# Altium PCB Hall Effect Sensor Panel PCB.PcbDoc
Units mm, origin at the board's own origin, x right, y up, seen from the top; angles counter-clockwise.
Board outline 358 x 45 mm, 2 copper layers (Top Layer, Bottom Layer); 56 components, 26 nets, 179 pads, 9 vias.
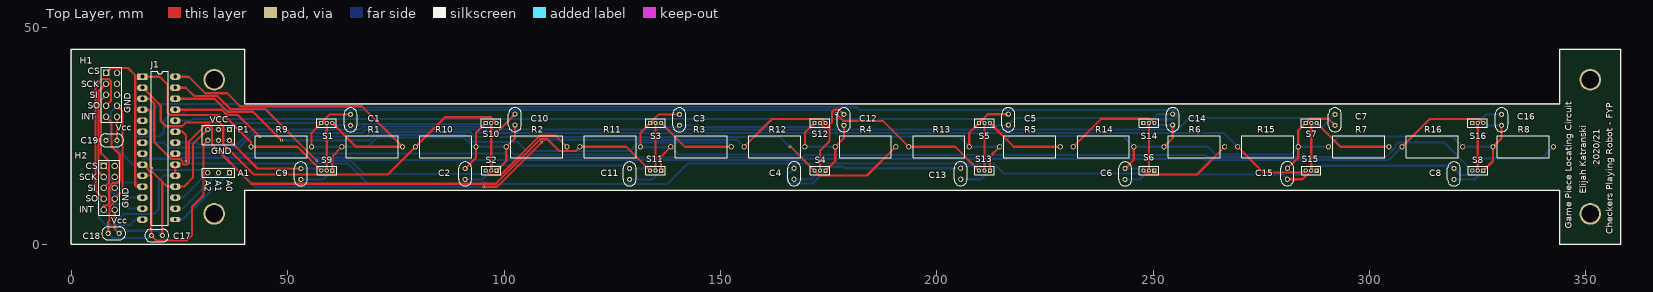
[diagram p0: Top Layer view]
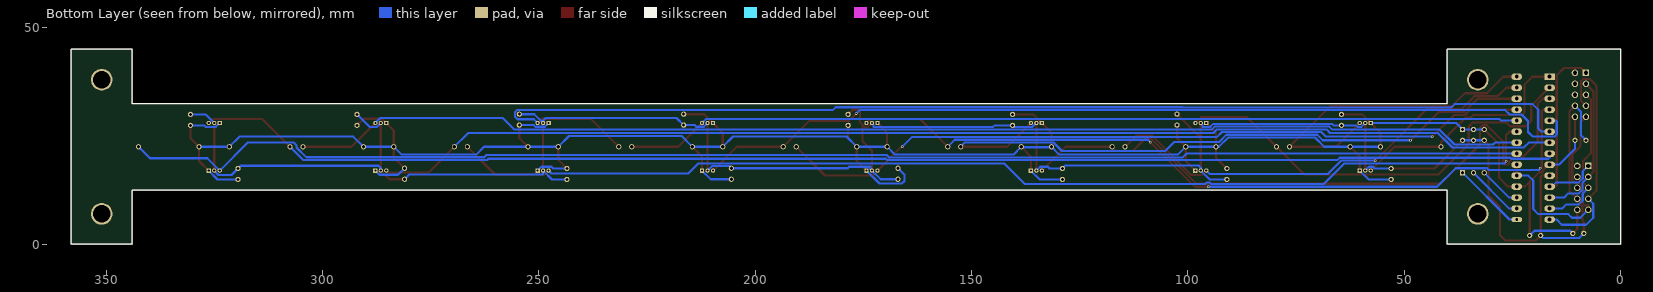
[diagram p1: Bottom Layer view, seen from below]

## Layer stack, top to bottom
Top Solder: solder mask 0.0102, Solder Resist, Dk 3.5
Top Layer: signal copper 0.0356
Dielectric 1: dielectric 0.32, FR-4, Dk 4.8
Bottom Layer: signal copper 0.0356
Bottom Solder: solder mask 0.0102, Solder Resist, Dk 3.5

## Board outline
344,32.5 344,45 358,45 358,0 344,0 344,12.5 40,12.5 40,0 0,0 0,45 40,45 40,32.5

## Design rules (kind name [scope] priority, off if disabled: settings)
Clearance [All] p1: gap=0.13 ignorepadtopadclearanceinfootprint=FALSE
PolygonConnect [All] p1: connectstyle=Relief reliefconductorwidth=0.254 reliefentries=4 polygonreliefangle="90 Angle" airgapwidth=0.254
RoutingVias [All] p1: holewidth=0.3 width=0.6 viastyle="Through Hole" minholewidth=0.3 minwidth=0.6 maxholewidth=0.3 maxwidth=0.6
SolderMaskExpansion [All] p1: expansion=0.102 istentingtop=FALSE
Width [All] p1: maxlimit=1 minlimit=0.3 preferedwidth=0.5
30 further rules are at their usual default settings.

## Components (designator, comment, footprint, x,y, rotation, side; value= is the part's Value field where it differs from the comment)
A1 "Address" ADDRESS 36.5,16.5 r270 top
C1 "0.1uF" C320C104K5R5TA 64.5,27.46 r90 top
C2 "0.1uF" C320C104K5R5TA 91,14.96 r90 top
C3 "0.1uF" C320C104K5R5TA 140.5,27.46 r90 top
C4 "0.1uF" C320C104K5R5TA 167,15 r90 top
C5 "0.1uF" C320C104K5R5TA 216.5,27.5 r90 top
C6 "0.1uF" C320C104K5R5TA 243.5,14.96 r90 top
C7 "0.1uF" C320C104K5R5TA 292,30 r270 top
C8 "0.1uF" C320C104K5R5TA 319.5,17.5 r270 top
C9 "0.1uF" C320C104K5R5TA 53,14.96 r90 top
C10 "0.1uF" C320C104K5R5TA 102.5,27.5 r90 top
C11 "0.1uF" C320C104K5R5TA 129,14.96 r90 top
C12 "0.1uF" C320C104K5R5TA 178.5,27.46 r90 top
C13 "0.1uF" C320C104K5R5TA 205.5,15 r90 top
C14 "0.1uF" C320C104K5R5TA 254.5,27.5 r90 top
C15 "0.1uF" C320C104K5R5TA 281,17.54 r270 top
C16 "0.1uF" C320C104K5R5TA 330.5,27.46 r90 top
C17 "0.1uF" C320C104K5R5TA 18.46,2 r0 top
C18 "0.1uF" C320C104K5R5TA 8.5,2.5 r0 top
C19 "0.1uF" C320C104K5R5TA 8,24 r0 top
H1 "1x7 Header" "PCB Header" 8,39.58 r0 top
H2 "1x7 Header" "PCB Header" 7.46,18.08 r0 top
J1 "16-Bit I/O Expander" MCP23S17-E/SP 16.38,38.7 r0 top
P1 "Power" POWER 36.5,26.5 r270 top
R1 "4k7R" CFR100J4K7 76.5,22.5 r180 top
R2 "4k7R" CFR100J4K7 114.5,22.5 r180 top
R3 "4k7R" CFR100J4K7 152.5,22.5 r180 top
R4 "4k7R" CFR100J4K7 190.5,22.5 r180 top
R5 "4k7R" CFR100J4K7 228.5,22.5 r180 top
R6 "4k7R" CFR100J4K7 266.5,22.5 r180 top
R7 "4k7R" CFR100J4K7 304.5,22.5 r180 top
R8 "4k7R" CFR100J4K7 342.5,22.5 r180 top
R9 "4k7R" CFR100J4K7 55.5,22.5 r180 top
R10 "4k7R" CFR100J4K7 93.5,22.5 r180 top
R11 "4k7R" CFR100J4K7 131.5,22.5 r180 top
R12 "4k7R" CFR100J4K7 169.5,22.5 r180 top
R13 "4k7R" CFR100J4K7 207.5,22.5 r180 top
R14 "4k7R" CFR100J4K7 245.5,22.5 r180 top
R15 "4k7R" CFR100J4K7 283.5,22.5 r180 top
R16 "4k7R" CFR100J4K7 321.5,22.5 r180 top
S1 "Hall Effect Sensor" A1104EUA-T 57.73,28 r90 top
S2 "Hall Effect Sensor" A1104EUA-T 98.27,17 r270 top
S3 "Hall Effect Sensor" A1104EUA-T 133.73,28 r90 top
S4 "Hall Effect Sensor" A1104EUA-T 174.27,17 r270 top
S5 "Hall Effect Sensor" A1104EUA-T 209.73,28 r90 top
S6 "Hall Effect Sensor" A1104EUA-T 250.27,17 r270 top
S7 "Hall Effect Sensor" A1104EUA-T 285.23,28 r90 top
S8 "Hall Effect Sensor" A1104EUA-T 326.27,17 r270 top
S9 "Hall Effect Sensor" A1104EUA-T 60.27,17 r270 top
S10 "Hall Effect Sensor" A1104EUA-T 95.73,28 r90 top
S11 "Hall Effect Sensor" A1104EUA-T 136.27,17 r270 top
S12 "Hall Effect Sensor" A1104EUA-T 171.73,28 r90 top
S13 "Hall Effect Sensor" A1104EUA-T 212.27,17 r270 top
S14 "Hall Effect Sensor" A1104EUA-T 247.73,28 r90 top
S15 "Hall Effect Sensor" A1104EUA-T 287.77,17 r270 top
S16 "Hall Effect Sensor" A1104EUA-T 323.73,28 r90 top

## Footprints (in the part's own frame and the unit in brackets; to place one, negate y for a bottom-side part, rotate by r counter-clockwise, add the part's x,y. Pads: shape width x height; smd on the part's side, far side on the other; paste and mask are expansions set on the pad)
A1104EUA-T [mm]
  rect 1x1 hole 0.5: 1(0,0)
  round 1 hole 0.5: 2(0,-1.27) 3(0,-2.54)
  silkscreen extent -1,-3.5 1,1
ADDRESS [mm]
  rect 1.2x1.2 hole 0.7: 1(0,0)
  round 1.2 hole 0.7: 2(0,-2.5) 3(0,-5)
  silkscreen extent -1,-6.25 1,1.25
C320C104K5R5TA [mm]
  round 1.2 hole 0.7: 1(0,0) 2(2.54,0)
  silkscreen extent -1.5,-1.5 4.04,1.5
CFR100J4K7 [mm]
  round 1.2 hole 0.76: 1(0,0) 2(14,0)
  silkscreen extent 1,-2.5 13,2.5
MCP23S17-E/SP [mm]
  rect 2.5x1.5 hole 0.9: 1(0,0)
  oval 2.5x1.5 hole 0.9: 2(0,-2.54) 3(0,-5.08) 4(0,-7.62) 5(0,-10.16) 6(0,-12.7) 7(0,-15.24) 8(0,-17.78) 9(0,-20.32) 10(0,-22.86) 11(0,-25.4) 12(0,-27.94) 13(0,-30.48) 14(0,-33.02) 16(7.62,-30.48) 17(7.62,-27.94) 18(7.62,-25.4) 19(7.62,-22.86) 20(7.62,-20.32) 21(7.62,-17.78) 22(7.62,-15.24) 23(7.62,-12.7) 24(7.62,-10.16) 25(7.62,-7.62) 26(7.62,-5.08) 27(7.62,-2.54) 28(7.62,0)
  oval 2.5x1.2 hole 0.65: 15(7.62,-33.02)
  silkscreen extent 2.08,-34.29 6,1.27
"PCB Header" [mm]
  rect 1.5x1.5 / inner rect 1.5x1.6 / far side rect 1.5x1.5 hole 1: 1(0,0)
  round 1.5 / inner oval 1.5x1.6 / far side round 1.5 hole 1: 2(0,-2.54) 3(0,-5.08) 4(0,-7.62) 5(0,-10.16) 6(2.54,-10.16) 7(2.54,-7.62) 8(2.54,-5.08) 9(2.54,-2.54) 10(2.54,0)
  silkscreen extent -1.15,-11.43 3.68,1.27
POWER [mm]
  rect 1.2x1.2 hole 0.7: 1(0,0)
  round 1.2 hole 0.7: 2(0,-2.5) 3(0,-5) 4(2.5,-5) 5(2.5,-2.5) 6(2.5,0)
  silkscreen extent -1,-6.25 3.5,1.25

## Part data
C1 C2 C3 C4 C5 C6 C7 C8 C9 C10 C11 C12 C13 C14 C15 C16 C17 C18 C19: library part C320C104K5R5TA, "KEMET - C320C104K5R5TA - Multilayer Ceramic Capacitor, Gold Max, 0.1 µF, 50 V, Goldmax, 300 Series, ± 10%, Radial Leaded", Capacitance=100nF, Case/Package=Radial, Dielectric=X7R, Dielectric Material=Ceramic, Manufacturer=KEMET, Max Operating Temperature=125°C, Min Operating Temperature=-55°C, Package Quantity=500, Supplier Part Number 1=1466304, Tolerance=10%, Voltage=50V, Category="Ceramic Capacitors", ComponentLink1Description=https://datasheet.ciiva.com/27052/1570161-27052544.pdf?src-supplier=Jameco, ComponentLink1URL=https://datasheet.ciiva.com/27052/1570161-27052544.pdf?src-supplier=Jameco, ComponentLink2Description=https://datasheet.ciiva.com/39122/f3101-goldmax-39122993.pdf?src-supplier=Onlinecomponents.com, ComponentLink2URL=https://datasheet.ciiva.com/39122/f3101-goldmax-39122993.pdf?src-supplier=Onlinecomponents.com, ComponentLink3Description=https://datasheet.ciiva.com/11786/0900766b80717e24-11786584.pdf?src-supplier=RSComponents, ComponentLink3URL=https://datasheet.ciiva.com/11786/0900766b80717e24-11786584.pdf?src-supplier=RSComponents, ComponentLink4Description=https://datasheet.ciiva.com/7817/1732702-7817354.pdf?src-supplier=Element14, ComponentLink4URL=https://datasheet.ciiva.com/7817/1732702-7817354.pdf?src-supplier=Element14, ComponentLink5Description=https://datasheet.ciiva.com/16624/datasheetpn-c320c104k5r5ca-16624750.pdf?src-supplier=Avnet+Europe, ComponentLink5URL=https://datasheet.ciiva.com/16624/datasheetpn-c320c104k5r5ca-16624750.pdf?src-supplier=Avnet+Europe, ComponentLink6Description=https://datasheet.ciiva.com/7817/f3101-goldmax-7817514.pdf?src-supplier=Element14, ComponentLink6URL=https://datasheet.ciiva.com/7817/f3101-goldmax-7817514.pdf?src-supplier=Element14, ComponentLink7Description=https://datasheet.ciiva.com/14585/70095037-14585005.pdf?src-supplier=Allied+Electronics, ComponentLink7URL=https://datasheet.ciiva.com/14585/70095037-14585005.pdf?src-supplier=Allied+Electronics, ComponentLink8Description=https://datasheet.ciiva.com/5389/f3101-goldmax-334604-5389886.pdf?src-supplier=Mouser, ComponentLink8URL=https://datasheet.ciiva.com/5389/f3101-goldmax-334604-5389886.pdf?src-supplier=Mouser, Depth=3.18mm, Dissipation Factor=2.5%, Height=3.18mm, Height - Seated (Max)=0.26inch, Lead Diameter=0.51mm, Lead Free="Lead Free", Lead Length=7mm, Lead Pitch=2.54mm, Lead/Base Style=Straight, Length=5.08mm, Manufacturer Part Number=C320C104K5R5TA, Mount="Through Hole,PCB", Number of Pins=2, Packaging=Bulk, Radiation Hardening=No, REACH SVHC="No SVHC", Resistor Type=Ceramic, RoHS=Yes, RoHS Compliant=Yes, Supplier 1=RSComponents, Termination=Radial, Voltage Rating=50V, Voltage Rating (DC)=50V, Width=0.125inch
H1 H2: library part 22-23-2071, "CONN HEADER VERT 7POS 2.54MM", Color=White, Contact Resistance=10mR, Current Rating=4A, Flammability Rating="UL94 V-0", Insulation Resistance=500GR, Manufacturer=Molex, Max Current Rating=10A, Max Operating Temperature=75°C, Max Voltage Rating (AC)=250V, Min Operating Temperature=0°C, Package Quantity=4000, Supplier Part Number 1=6795603P, Approvals=UL,CSA, Category="Headers and Wire Housings", ComponentLink1Description=https://datasheet.ciiva.com/30052/39000022232071-pcb-headers-30052246.pdf?src-supplier=Onlinecomponents.com, ComponentLink1URL=https://datasheet.ciiva.com/30052/39000022232071-pcb-headers-30052246.pdf?src-supplier=Onlinecomponents.com, ComponentLink2Description=https://datasheet.ciiva.com/7839/1575011-7839927.pdf?src-supplier=Element14, ComponentLink2URL=https://datasheet.ciiva.com/7839/1575011-7839927.pdf?src-supplier=Element14, ComponentLink3Description=https://datasheet.ciiva.com/5154/0022232071-pcb-headers-227102-5154393.pdf?src-supplier=Mouser, ComponentLink3URL=https://datasheet.ciiva.com/5154/0022232071-pcb-headers-227102-5154393.pdf?src-supplier=Mouser, ComponentLink4Description=https://datasheet.ciiva.com/11749/0900766b80d8f4d1-11749289.pdf?src-supplier=RSComponents, ComponentLink4URL=https://datasheet.ciiva.com/11749/0900766b80d8f4d1-11749289.pdf?src-supplier=RSComponents, ComponentLink5Description=https://datasheet.ciiva.com/19462/1966270-19462253.pdf?src-supplier=Jameco, ComponentLink5URL=https://datasheet.ciiva.com/19462/1966270-19462253.pdf?src-supplier=Jameco, ComponentLink6Description=https://datasheet.ciiva.com/49273/232311-49273642.pdf?src-supplier=Jameco, ComponentLink6URL=https://datasheet.ciiva.com/49273/232311-49273642.pdf?src-supplier=Jameco, ComponentLink7Description=https://datasheet.ciiva.com/16725/0022232071-pcb-headers-16725645.pdf?src-supplier=Avnet+Europe, ComponentLink7URL=https://datasheet.ciiva.com/16725/0022232071-pcb-headers-16725645.pdf?src-supplier=Avnet+Europe, ComponentLink8Description=https://datasheet.ciiva.com/10087/0022232071-pcb-headers-10087214.pdf?src-supplier=Avnet, ComponentLink8URL=https://datasheet.ciiva.com/10087/0022232071-pcb-headers-10087214.pdf?src-supplier=Avnet, Contact Gender=Male, Contact Material=Brass, Contact Plating=Tin,Copper, Depth=3.56mm, Gender=Male, Glow Wire Compliant=Non-compliant, Halogen Free="Low Halogen", Height=4.5mm, Housing Color=White, Housing Material=Nylon, Lead Free="Lead Free", Manufacturer Part Number=22-23-2071, Mount="Through Hole,Cable", Number of Circuits=7, Number of Contacts=7, Number of Positions=7, Number of Rows=1, Orientation=Straight, Packaging=Bulk, Pitch=2.54mm, Pricing 1="10=0.34600 (USD)", Radiation Hardening=No, REACH SVHC=Unknown, RoHS=Yes, RoHS Compliant=Yes, Series=6373, Stock 1=4279, Supplier 1=RSComponents, Termination="Through Hole", Voltage Rating=250V, Voltage Rating (DC)=250V
J1: library part MCP23S17-E/SP, "TE CONNECTIVITY         CFR100J4K7             Through Hole Resistor, 4.7 kohm, 500 V, Axial Leaded, 1 W,  5%, CFR Series", Case/Package=PDIP, Frequency=10MHz, Manufacturer=Microchip, Max Operating Temperature=125°C, Max Supply Voltage=5.5V, Min Operating Temperature=-40°C, Min Supply Voltage=1.8V, Nominal Supply Current=1mA, Number of Resistors=1, Power Rating=1W, Resistance=4.7kR, Resistor Type="Thin Film", Supplier Part Number 1=9126833, Temperature Coefficient=0ppm/°C, Tolerance=5%, Voltage Rating=500V, Category="Interface ICs", ComponentLink1Description=https://datasheet.ciiva.com/12096/21952b-70868-12096976.pdf?src-supplier=Mouser, ComponentLink1URL=https://datasheet.ciiva.com/12096/21952b-70868-12096976.pdf?src-supplier=Mouser, ComponentLink2Description=https://datasheet.ciiva.com/1780/21952b-1780558.pdf?src-supplier=Digi-Key, ComponentLink2URL=https://datasheet.ciiva.com/1780/21952b-1780558.pdf?src-supplier=Digi-Key, ComponentLink3Description=https://datasheet.ciiva.com/1495/12179-1495925.pdf?src-supplier=Element14, ComponentLink3URL=https://datasheet.ciiva.com/1495/12179-1495925.pdf?src-supplier=Element14, ComponentLink4Description=https://datasheet.ciiva.com/1496/12179-1496067.pdf?src-supplier=Element14, ComponentLink4URL=https://datasheet.ciiva.com/1496/12179-1496067.pdf?src-supplier=Element14, ComponentLink5Description=https://datasheet.ciiva.com/16331/filehandler-aspxddocname-en023709-16331287.pdf?src-supplier=Future+Electronics, ComponentLink5URL=https://datasheet.ciiva.com/16331/filehandler-aspxddocname-en023709-16331287.pdf?src-supplier=Future+Electronics, ComponentLink6Description=https://datasheet.ciiva.com/16617/21952b-16617642.pdf?src-supplier=Avnet+Europe, ComponentLink6URL=https://datasheet.ciiva.com/16617/21952b-16617642.pdf?src-supplier=Avnet+Europe, ComponentLink7Description=https://datasheet.ciiva.com/18405/70046137-18405548.pdf?src-supplier=Allied+Electronics, ComponentLink7URL=https://datasheet.ciiva.com/18405/70046137-18405548.pdf?src-supplier=Allied+Electronics, ComponentLink8Description=https://datasheet.ciiva.com/29305/651444-da-01-en-ic-i-o-exp-mcp23s17-e-sp-spdip-28-mcp-29305148.pdf?src-supplier=Conrad, ComponentLink8URL=https://datasheet.ciiva.com/29305/651444-da-01-en-ic-i-o-exp-mcp23s17-e-sp-spdip-28-mcp-29305148.pdf?src-supplier=Conrad, ComponentLink9Description=https://datasheet.ciiva.com/11823/0900766b80098b49-11823401.pdf?src-supplier=RSComponents, ComponentLink9URL=https://datasheet.ciiva.com/11823/0900766b80098b49-11823401.pdf?src-supplier=RSComponents, ComponentLink10Description=https://datasheet.ciiva.com/22664/1723854-22664921.pdf?src-supplier=Element14, ComponentLink10URL=https://datasheet.ciiva.com/22664/1723854-22664921.pdf?src-supplier=Element14, ComponentLink11Description=https://datasheet.ciiva.com/16773/70063023-16773435.pdf?src-supplier=Allied+Electronics, ComponentLink11URL=https://datasheet.ciiva.com/16773/70063023-16773435.pdf?src-supplier=Allied+Electronics, Diameter=5mm, ELV=Compliant, Interface=SPI,Serial, Lead Free="Lead Free", Length=12mm, Manufacturer Part Number=MCP23S17-E/SP, Max Frequency=10MHz, Mount="Through Hole,Surface Mount", Number of Bits=16, Number of Channels=1, Number of I/Os=16, Number of Pins=28, Number of Terminations=2, Packaging=Rail/Tube, Pricing 1="15=1.29300, 30=1.22600, 105=1.10500 (USD)", Pricing 2="10=0.11800, 100=0.10100, 250=0.08900, 500=0.07500, 1000=0.06400 (USD)", REACH SVHC="No SVHC", RoHS=Yes, RoHS Compliant=Yes, Stock 1=210, Stock 2=2440, Supplier 1=RSComponents, Supply Current=1mA, Supply Voltage-Nom=5.5V, Termination=Axial, Voltage Rating (DC)=500V
R1 R2 R3 R4 R5 R6 R7 R8 R9 R10 R11 R12 R13 R14 R15 R16: library part CFR100J4K7, "TE CONNECTIVITY         CFR100J4K7             Through Hole Resistor, 4.7 kohm, 500 V, Axial Leaded, 1 W,  5%, CFR Series", Case/Package=Conformal, Manufacturer="TE Connectivity", Max Operating Temperature=155°C, Min Operating Temperature=-55°C, Number of Resistors=1, Power Rating=1W, Resistance=4.7kR, Resistor Type="Thin Film", Supplier Part Number 1=0131873, Temperature Coefficient=0ppm/°C, Tolerance=5%, Voltage Rating=500V, Category="Through-Hole Resistors", ComponentLink1Description=https://datasheet.ciiva.com/11823/0900766b80098b49-11823401.pdf?src-supplier=RSComponents, ComponentLink1URL=https://datasheet.ciiva.com/11823/0900766b80098b49-11823401.pdf?src-supplier=RSComponents, ComponentLink2Description=https://datasheet.ciiva.com/22664/1723854-22664921.pdf?src-supplier=Element14, ComponentLink2URL=https://datasheet.ciiva.com/22664/1723854-22664921.pdf?src-supplier=Element14, ComponentLink3Description=https://datasheet.ciiva.com/16773/70063023-16773435.pdf?src-supplier=Allied+Electronics, ComponentLink3URL=https://datasheet.ciiva.com/16773/70063023-16773435.pdf?src-supplier=Allied+Electronics, Diameter=5mm, ELV=Compliant, Length=12mm, Manufacturer Part Number=CFR100J4K7, Mount=Axial, Number of Terminations=2, Packaging="Ammo Pack", Pricing 1="10=0.11800, 100=0.10100, 250=0.08900, 500=0.07500, 1000=0.06400 (USD)", REACH SVHC="No SVHC", RoHS=Yes, Stock 1=2440, Supplier 1=RSComponents, Termination=Axial, Voltage Rating (DC)=500V
S1 S2 S3 S4 S5 S6 S7 S8 S9 S10 S11 S12 S13 S14 S15 S16: library part A1104EUA-T, "ALLEGRO MICROSYSTEMS - A1104EUA-T - IC, HALL-EFFECT SWITCH SIP-3", Case/Package=SIP, Manufacturer="Allegro MicroSystems", Max Operating Temperature=85°C, Max Output Current=25mA, Max Supply Current=7.5mA, Max Supply Voltage=24V, Min Operating Temperature=-40°C, Min Supply Voltage=3.8V, Package Quantity=4000, Supplier Part Number 1=6807488, Category="Magnetic Sensors", ComponentLink1Description=https://datasheet.ciiva.com/15099/getdatasheetpartid-305695-15099469.pdf?src-supplier=Verical, ComponentLink1URL=https://datasheet.ciiva.com/15099/getdatasheetpartid-305695-15099469.pdf?src-supplier=Verical, ComponentLink2Description=https://datasheet.ciiva.com/1173/1697218-1173986.pdf?src-supplier=Newark, ComponentLink2URL=https://datasheet.ciiva.com/1173/1697218-1173986.pdf?src-supplier=Newark, ComponentLink3Description=https://datasheet.ciiva.com/3272/a110x-datasheet-3272173.pdf?src-supplier=Avnet, ComponentLink3URL=https://datasheet.ciiva.com/3272/a110x-datasheet-3272173.pdf?src-supplier=Avnet, Height=3.02mm, Lead Free="Lead Free", Length=4.09mm, Manufacturer Part Number=A1104EUA-T, Mount="Through Hole", Number of Pins=3, Operating Supply Current=7.5mA, Output Current=25mA, Output Type=Digital, Packaging=Bulk, Pricing 1="5=1.09300, 25=0.90800, 100=0.76300, 250=0.71200, 500=0.67100 (USD)", Radiation Hardening=No, REACH SVHC="No SVHC", RoHS=Yes, RoHS Compliant=Yes, Stock 1=245, Supplier 1=RSComponents, Type="Unipolar Switch", Width=1.52mm

## Free pads (board coordinates)
  round 5 hole 4: 1(33,38) 2(33,7) 3(351,38) 4(351,7)

## Via types
v1: diameter 0.6, hole 0.3, Top Layer to Bottom Layer, 9 vias

## Nets (pads, with @x,y where several pads share a name; then routed paths per layer and width w, separated by ;. In a path a pad name is that pad's centre, name@x,y a point inside that pad or via, vN(x,y) a via of type N, cw(c..) or ccw(c..) an arc to the next point about the centre after c; other vN are vias at no path point)
GND: C1.1 C2.1 C3.1 C4.1 C5.1 C6.1 C7.1 C8.1 C9.2 C10.2 C11.2 C12.2 C13.2 C14.2 C15.2 C16.2 C17.1 C18.1 C19.1 H1.7 H2.7 J1.10 P1.4 P1.5 P1.6 S1.2 S2.2 S3.2 S4.2 S5.2 S6.2 S7.2 S8.2 S9.2 S10.2 S11.2 S12.2 S13.2 S14.2 S15.2 S16.2 | length 555.3
  Top Layer w0.5: C18.1 8.5,5.071 8.763,5.334 8.763,8.567 10,9.804 H2.7 11.786,12.246 11.786,30.714 H1.7 ; J1.10 18.339,15.84 18.46,15.719 C17.1 19.622,0.838 26.67,0.838 27.864,2.032 27.864,8.636 30.505,11.278 30.505,23.005 P1.4 ; P1.6 43,17.5 C9.2 ; S9.2 S1.2 ; S2.2 97,24.54 ; S10.2 97,24.54 ; C10.2 97,24.54 ; S11.2 S3.2 ; S4.2 173,21.565 175.158,23.723 175.158,27.558 ; S12.2 174.076,26.924 174.524,26.924 175.158,27.558 ; C12.2 177.436,31.064 176.276,31.064 175.743,30.531 175.743,28.143 175.158,27.558 ; S13.2 S5.2 ; S6.2 S14.2 ; C15.2 284.5,15 S15.2 S7.2 ; S8.2 S16.2
  Bottom Layer w0.5: C19.1 9.144,25.144 9.144,30.564 H1.7 ; C18.1 9.603,1.397 17.857,1.397 C17.1 ; P1.4 P1.5 P1.6 ; C9.2 56.845,17.5 57.227,17.882 58.118,17.882 S9.2 ; S1.2 59.898,27.102 60.757,27.102 61.115,27.46 C1.1 66.364,27.46 66.697,27.793 94.102,27.793 94.794,27.102 96.622,27.102 96.622,27.622 S10.2 ; C2.1 94.96,14.96 S2.2 97,17.65 97.536,18.186 128.314,18.186 C11.2 131.953,17.5 132.335,17.882 134.118,17.882 S11.2 ; S3.2 135.898,27.102 140.142,27.102 C3.1 144.653,27.46 145.011,27.102 172.618,27.102 172.618,27.618 S12.2 ; C4.1 171,15 S4.2 173.38,17.38 173.38,17.882 178.232,17.882 178.573,17.54 C13.2 205.994,18.034 209.966,18.034 S13.2 ; S5.2 211.88,27.12 213.589,27.12 213.969,27.5 C5.1 218.159,29.159 248.412,29.159 249,28.571 S14.2 251.04,30.04 C14.2 ; C6.1 246.96,14.96 S6.2 249,16.078 279.922,16.078 C15.2 ; S15.2 286.5,17.59 287.02,18.11 318.89,18.11 C8.1 320.998,16.002 324.002,16.002 S8.2 ; S7.2 287.398,27.102 289.102,27.102 C7.1 ; S16.2 327,30 C16.2
NetA1_1: A1.1 J1.15 | length 17
  Bottom Layer w0.5: J1.15 25.68,5.68 A1.1
NetA1_2: A1.2 J1.16 | length 13.4
  Bottom Layer w0.5: J1.16 25.72,8.22 A1.2
NetA1_3: A1.3 J1.17 | length 9.9
  Bottom Layer w0.5: J1.17 25.76,10.76 A1.3
NetH1_1: H1.1 H2.1 J1.11 | length 47
  Top Layer w0.5: H1.1 9.136,40.716 13.056,40.716 14.732,39.04 14.732,13.554 14.986,13.3 J1.11
  Bottom Layer w0.5: H2.1 8.725,16.815 8.725,15.202 9.652,14.275 14.9,14.275 15.875,13.3 J1.11
NetH1_2: H1.2 H2.2 J1.12 | length 34.6
  Top Layer w0.5: H2.2 6.24,16.76 6.24,35.28 H1.2
  Bottom Layer w0.5: H2.2 8.765,14.235 8.765,12.622 9.652,11.735 12.09,11.735 13.065,10.76 J1.12
NetH1_3: H1.3 H2.3 J1.13 | length 35
  Top Layer w0.5: H2.3 8.65,14.19 8.65,19.21 6.87,20.99 6.87,33.37 H1.3
  Bottom Layer w0.5: H2.3 8.738,11.722 8.738,10.109 9.652,9.195 12.573,9.195 13.548,8.22 J1.13
NetH1_4: H1.4 H2.4 J1.14 | length 53.6
  Top Layer w0.5: H2.4 5.588,12.332 5.588,36.652 7.112,38.176 8.636,38.176 9.144,37.668 9.144,33.104 H1.4
  Bottom Layer w0.5: H2.4 6.325,9.325 6.325,6.096 7.95,4.47 13.573,4.47 14.783,5.68 J1.14
NetH1_5: H1.5 H2.5 J1.19 J1.20 | length 53.1
  Top Layer w0.5: H2.5 7.46,8.897 8.202,8.897 8.738,9.433 8.738,13.336 9.532,14.13 10.549,14.13 11.151,14.732 11.151,20.726 9.271,22.606 9.271,28.149 H1.5 ; J1.19 J1.20
  Bottom Layer w0.5: H2.5 9.284,6.096 11.214,6.096 12.053,6.934 18.999,6.934 20.193,8.128 20.193,14.697 21.336,15.84 J1.19
NetJ1_1: J1.1 R9.2 S9.3 | length 54.7
  Top Layer w0.5: J1.1 20.406,38.7 22.174,36.932 22.174,30.48 22.835,29.82 34.107,29.82 34.694,29.233 35.842,29.233 41.5,23.575 R9.2 52.23,22.5 S9.3
NetJ1_2: J1.2 R10.2 S10.3 | length 101.8
  Top Layer w0.5: J1.2 17.272,36.16 17.272,35.382 20.65,32.004 20.65,28.448 21.844,27.254 25.578,27.254 26.434,28.11 34.171,28.11 35.077,27.203 35.077,23.165 42.139,16.104 73.104,16.104 R10.2 86.337,29.337 96.933,29.337 S10.3
NetJ1_3: J1.3 R11.2 S11.3 | length 151.7
  Top Layer w0.5: J1.3 18.009,33.62 19.137,32.492 19.137,23.612 23.089,19.66 25.222,19.66 25.63,19.252 25.63,18.718 25.908,18.44 26.772,18.44 27.127,18.796 27.127,23.698 30.909,27.48 31.931,27.48 32.487,26.924 32.487,23.012 41.529,13.97 98.069,13.97 108.356,24.257 110.007,24.257 112.751,21.514 116.514,21.514 R11.2 128.23,22.5 S11.3
NetJ1_4: J1.4 R12.2 S12.3 | length 181.4
  Top Layer w0.5: J1.4 17.942,31.08 18.216,30.806 18.216,17.878 v1(18.542,17.551) ; v1(95.275,13.259) 98.374,13.259 v1(108.687,23.571) ; R12.2 161.905,28.905 173.365,28.905 S12.3
  Bottom Layer w0.5: v1(18.542,17.551) 18.974,17.12 30.455,17.12 30.886,17.551 38.125,17.551 42.418,13.259 v1(95.275,13.259) ; v1(108.687,23.571) 109.225,24.11 153.89,24.11 R12.2
NetJ1_5: J1.5 R13.2 S13.3 | length 209.7
  Top Layer w0.5: v1(176.657,30.175) 178.333,28.499 187.501,28.499 R13.2 204.23,22.5 S13.3
  Bottom Layer w0.5: J1.5 14.986,28.54 14.732,28.286 14.732,25.375 15.24,24.867 20.32,24.867 21.387,25.933 21.387,28.448 22.885,29.947 25.629,29.947 26.662,30.98 101.744,30.98 101.784,31.02 103.48,31.02 103.52,30.98 175.852,30.98 v1(176.657,30.175)
NetJ1_6: J1.6 R14.2 S14.3 | length 273.8
  Top Layer w0.5: R14.2 237.981,28.981 249.289,28.981 S14.3
  Bottom Layer w0.5: J1.6 18.288,26 19.025,26.737 19.025,31.064 20.32,32.36 38.329,32.36 39.078,31.61 101.106,31.61 101.146,31.65 181.354,31.65 181.966,31.039 254.94,31.039 255.499,30.48 255.499,29.464 254.914,28.88 251.15,28.88 S14.3
NetJ1_7: J1.7 R15.2 S15.3 | length 275.4
  Top Layer w0.5: R15.2 275.465,16.535 284.765,16.535 S15.3
  Bottom Layer w0.5: J1.7 21.237,23.46 22.37,22.327 38.837,22.327 42.215,25.705 67.129,25.705 67.957,26.533 93.247,26.533 94.075,25.705 266.295,25.705 R15.2
NetJ1_8: J1.8 R16.2 S16.3 | length 315.8
  Top Layer w0.5: R16.2 313.905,28.905 325.365,28.905 S16.3
  Bottom Layer w0.5: J1.8 16.358,20.92 16.358,20.066 16.688,19.736 25.183,19.736 25.431,19.984 64.918,19.984 65.479,19.423 169.408,19.423 169.721,19.736 261.677,19.736 261.977,19.436 304.436,19.436 R16.2
NetJ1_21: J1.21 R8.1 S8.3 | length 326
  Bottom Layer w0.5: J1.21 100.327,20.92 101.194,20.053 169.075,20.053 169.621,20.599 262.077,20.599 262.611,20.066 303.708,20.066 305.994,22.352 305.994,22.86 306.629,23.495 317.235,23.495 S8.3 326.593,19.863 339.863,19.863 R8.1
NetJ1_22: J1.22 R7.1 S7.3 | length 286.6
  Top Layer w0.5: S7.3 293.27,22.5 R7.1
  Bottom Layer w0.5: J1.22 29.016,23.46 29.464,23.012 38.379,23.012 41.834,26.467 66.631,26.467 67.327,27.163 93.792,27.163 94.488,26.467 179.426,26.467 255.674,26.49 258.343,29.159 286.611,29.159 S7.3
NetJ1_23: J1.23 R6.1 S6.3 | length 257.6
  Top Layer w0.5: J1.23 25.679,26 26.441,25.238 v1(26.441,19.126) ; S6.3 248.626,16.104 260.104,16.104 R6.1
  Bottom Layer w0.5: v1(26.441,19.126) 26.949,18.618 63.906,18.618 68.605,13.919 94.604,13.919 94.909,14.224 95.639,14.224 95.944,13.919 137.719,13.919 142.469,18.669 213.106,18.669 215.443,16.332 247.062,16.332 S6.3
NetJ1_24: J1.24 R5.1 S5.3 | length 207.3
  Top Layer w0.5: S5.3 217.77,22.5 R5.1
  Bottom Layer w0.5: J1.24 27.626,28.54 28.042,28.956 211.314,28.956 S5.3
NetJ1_25: J1.25 R4.1 S4.3 | length 176.4
  Top Layer w0.5: J1.25 34.724,31.08 35.941,29.863 38.463,29.863 v1(43.485,24.841) ; v1(166.014,22.504) 166.226,22.504 S4.3 172.88,15.85 183.85,15.85 R4.1
  Bottom Layer w0.5: v1(43.485,24.841) 68.072,24.841 69.134,25.903 92.124,25.903 93.287,24.74 163.779,24.74 v1(166.014,22.504)
NetJ1_26: J1.26 R3.1 S3.3 | length 154.3
  Top Layer w0.5: J1.26 33.075,33.62 36.078,30.617 41.951,30.617 v1(48.539,24.028) ; S3.3 141.77,22.5 R3.1
  Bottom Layer w0.5: v1(48.539,24.028) 68.862,24.028 70.106,25.273 91.105,25.273 92.756,23.622 103.149,23.622 105.258,21.514 129.083,21.514 131.049,23.48 151.52,23.48 R3.1
NetJ1_27: J1.27 R2.1 S2.3 | length 104.3
  Top Layer w0.5: J1.27 26.441,36.16 28.351,34.25 33.705,34.25 36.708,31.247 44.775,31.247 v1(56.718,19.304) ; S2.3 96.779,15.951 99.136,15.951 108.229,25.044 111.956,25.044 R2.1
  Bottom Layer w0.5: v1(56.718,19.304) 64.613,19.304 67.686,16.231 94.961,16.231 S2.3
NetJ1_28: J1.28 R1.1 S1.3 | length 77.7
  Top Layer w0.5: J1.28 27.076,38.7 30.896,34.88 35.986,34.88 38.989,31.877 67.123,31.877 R1.1 65.77,22.5 S1.3
Vcc: C1.2 C2.2 C3.2 C4.2 C5.2 C6.2 C7.2 C8.2 C9.1 C10.1 C11.1 C12.1 C13.1 C14.1 C15.1 C16.1 C17.2 C18.2 C19.2 H1.6 H2.6 J1.9 J1.18 P1.1 P1.2 P1.3 R1.2 R2.2 R3.2 R4.2 R5.2 R6.2 R7.2 R8.2 R9.1 R10.1 R11.1 R12.1 R13.1 R14.1 R15.1 R16.1 S1.1 S2.1 S3.1 S4.1 S5.1 S6.1 S7.1 S8.1 S9.1 S10.1 S11.1 S12.1 S13.1 S14.1 S15.1 S16.1 | length 606.8
  Top Layer w0.5: H2.6 10,3.54 C18.2 ; C19.2 H1.6 ; J1.9 16.967,18.38 18.11,16.611 18.796,16.611 21,14.407 ; C17.2 21,14.407 ; P1.3 28.067,23.067 28.067,15.357 26.01,13.3 J1.18 22.107,13.3 21,14.407 ; R9.1 55.5,25.77 S1.1 59.73,30 C1.2 ; S9.1 60.27,20.27 R1.2 ; C2.2 93.5,20 R10.1 93.5,25.77 S10.1 ; S2.1 100.5,19.23 R2.2 102.5,24.5 C10.1 ; R11.1 131.5,25.77 S3.1 135.73,30 C3.2 ; S11.1 136.27,20.27 R3.2 ; R12.1 169.5,25.77 S12.1 ; S4.1 176.5,19.23 R4.2 178.5,24.5 C12.1 ; R13.1 207.5,25.77 S5.1 211.77,30.04 C5.2 ; S13.1 212.27,20.27 R5.2 ; C6.2 245.5,19.5 R14.1 ; R6.2 254.5,24.5 C14.1 ; C15.1 283.5,20.04 R15.1 283.5,26.27 S7.1 286.23,29 290.46,29 C7.2 ; S8.1 328.5,19.23 R8.2 330.5,24.5 C16.1
  Bottom Layer w0.5: C19.2 10.54,22.064 14.224,18.38 J1.9 ; C18.2 11.639,3.099 19.901,3.099 C17.2 ; P1.3 P1.2 P1.1 38,28 S1.1 ; C9.1 58.23,14.96 S9.1 ; R9.1 R1.2 68.471,22.5 70.614,24.643 90.695,24.643 92.838,22.5 R10.1 R2.2 102.317,20.683 129.683,20.683 R11.1 131.595,22.405 138.405,22.405 R3.2 140.304,20.696 167.696,20.696 R12.1 R4.2 178.867,24.867 205.133,24.867 R13.1 R5.2 216.994,24.994 243.006,24.994 R14.1 R6.2 262.661,22.5 264.465,20.696 281.696,20.696 R15.1 R7.2 292.841,24.841 319.159,24.841 R16.1 R8.2 ; C11.1 134.23,14.96 S11.1 ; C4.2 165.5,16.04 165.5,14.616 166.116,14 171.27,14 S4.1 ; C13.1 210.27,15 S13.1 ; C6.2 246.685,17.5 247.066,17.882 249.388,17.882 S6.1 ; S14.1 248.61,27.12 250.775,27.12 251.155,27.5 C14.1 ; C15.1 282.513,16.027 286.797,16.027 S15.1 ; C8.2 324.23,14.96 S8.1 ; S16.1 324.628,27.102 326.997,27.102 327.355,27.46 C16.1
pads on no net: H1.8 H1.9 H1.10 H2.8 H2.9 H2.10

## Silkscreen, mask and mechanical layers (free items; w line width, h text height)
Top Overlay:
  the board outline again, w0.254
  text "2020/21" at 353.246,18.254 h1.52 r90
  text "Elijah Katranski" at 350.074,11.649 h1.52 r90
  text "Game Piece Locating Circuit" at 346.738,3.524 h1.52 r90
  text "Checkers Playing Robot - FYP" at 356.238,2.254 h1.52 r90
Bottom Overlay:
  the board outline again, w0.254

## Text inside footprints (layer, text, board x,y; h text height)
A1: Top Overlay "A2" at 30.754,14.746 h1.52 r270; Top Overlay "A0" at 35.754,14.746 h1.52 r270
H1: Top Overlay "INT" at 2.254,28.754 h1.52; Top Overlay "SO" at 3.754,31.254 h1.52; Top Overlay "Vcc" at 10.254,26.254 h1.52; Top Overlay "GND" at 13.746,30.254 h1.52 r90; Top Overlay "CS" at 3.754,39.254 h1.52; Top Overlay "SCK" at 2.254,36.254 h1.52; Top Overlay "SI" at 4.254,33.754 h1.52
H2: Top Overlay "INT" at 1.754,7.254 h1.52; Top Overlay "SO" at 3.254,9.754 h1.52; Top Overlay "Vcc" at 9.254,4.754 h1.52; Top Overlay "GND" at 13.246,8.334 h1.52 r90; Top Overlay "CS" at 3.254,17.254 h1.52; Top Overlay "SCK" at 1.754,14.754 h1.52; Top Overlay "SI" at 3.754,12.254 h1.52
P1: Top Overlay "VCC" at 32,28 h1.52; Top Overlay "GND" at 32.254,20.754 h1.52